# Altium PCB TM1638.PcbDoc (part 2 of 2)
Units mil, origin at the board's own origin, x right, y up, seen from the top; angles counter-clockwise.
Board outline 4735 x 2655 mil, 2 copper layers (Top Layer, Bottom Layer); 45 components, 32 nets, 151 pads, 57 vias.
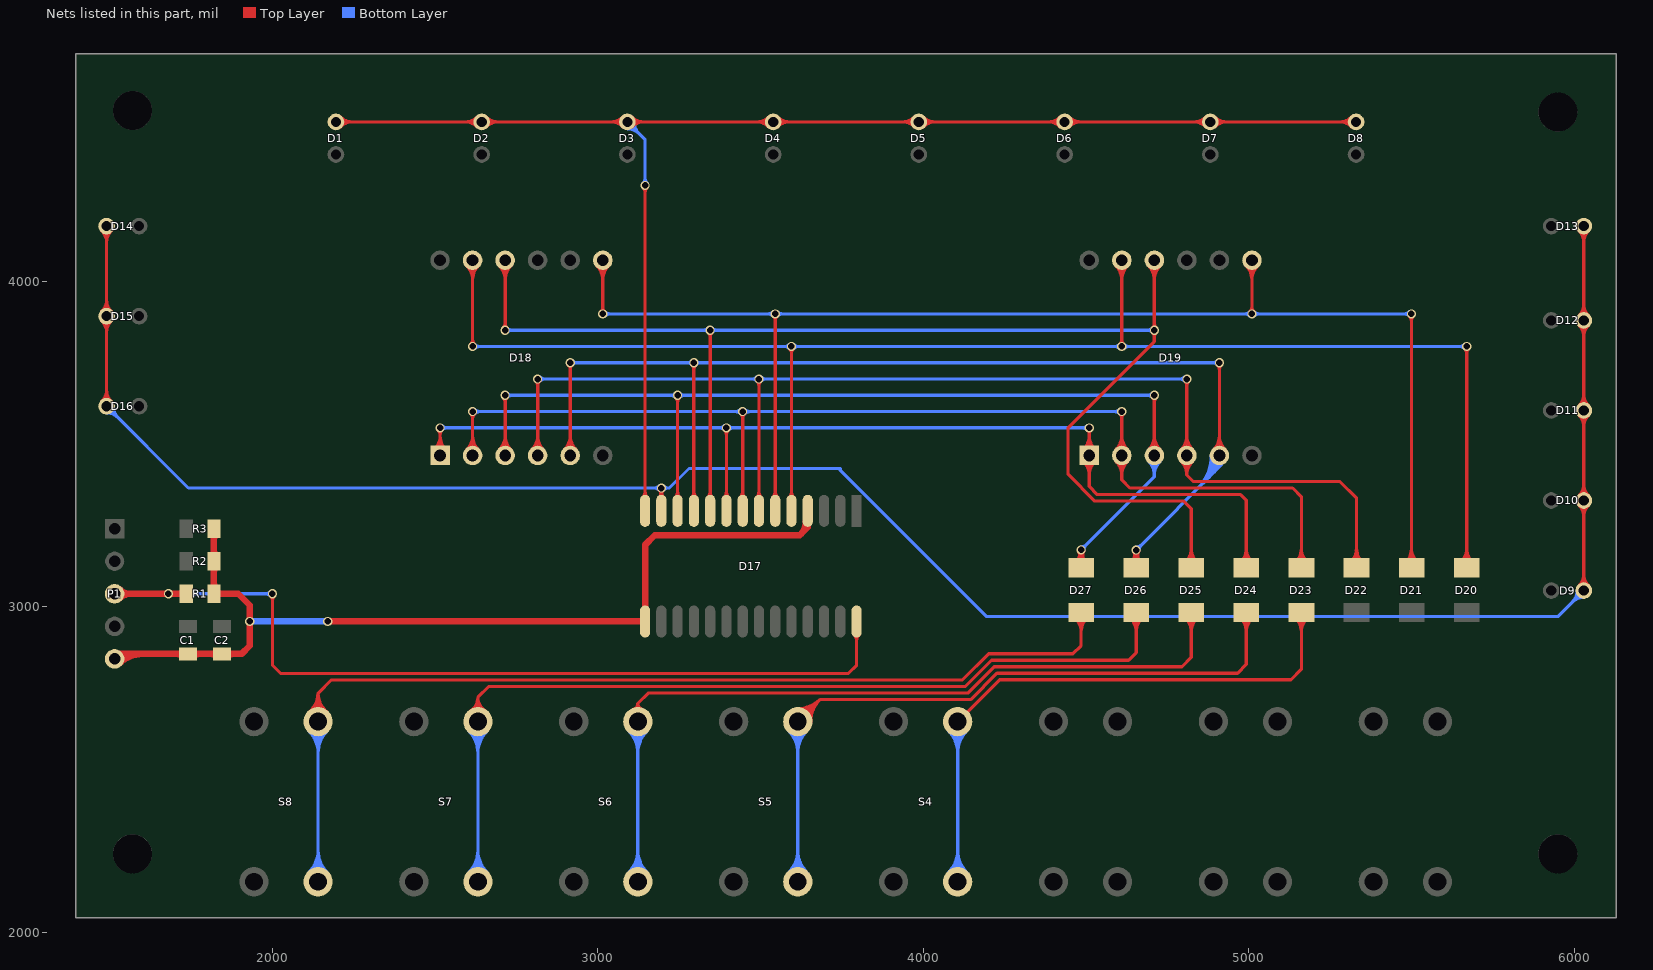
[diagram p2: the nets of this part, all layers, seen from the top]

## Via types
v1: diameter 28, hole 20, Top Layer to Bottom Layer, 57 vias

## Nets (pads, with @x,y where several pads share a name; then routed paths per layer and width w, separated by ;. In a path a pad name is that pad's centre, name@x,y a point inside that pad or via, vN(x,y) a via of type N, cw(c..) or ccw(c..) an arc to the next point about the centre after c; other vN are vias at no path point) (continued)
NetD23_2: D23.2 S4.2 | length 2620
  Top Layer w10: S4.2@4105.71,2647 4234.57,2775.86 5130,2775.86 5162.14,2808 D23.2@5162.14,2982.2 ; D23.2@5144.8,2964.86 cw(c5102.93,2922.99) 5162.14,2922.99 cw(c5221.36,2922.99) D23.2@5179.49,2964.86 ; D23.2@5151.87,2971.93 cw(c5127.07,2947.13) 5162.14,2947.13 cw(c5197.21,2947.13) D23.2@5172.41,2971.93
  Bottom Layer w10: S4.2@4077.43,2183.28 ccw(c4009.15,2251.57) 4105.71,2251.57 ccw(c4202.28,2251.57) S4.2@4134,2183.28 ; S4.2@4077.43,2618.72 cw(c4009.15,2550.43) 4105.71,2550.43 cw(c4202.28,2550.43) S4.2@4134,2618.72 ; S4.2@4084.5,2176.21 ccw(c4033.29,2227.43) 4105.71,2227.43 ccw(c4178.14,2227.43) S4.2@4126.93,2176.21 ; S4.2@4084.5,2625.79 cw(c4033.29,2574.57) 4105.71,2574.57 cw(c4178.14,2574.57) S4.2@4126.93,2625.79 ; S4.2@4091.57,2169.14 ccw(c4057.43,2203.28) 4105.71,2203.28 ccw(c4154,2203.28) S4.2@4119.86,2169.14 ; S4.2@4091.57,2632.86 cw(c4057.43,2598.72) 4105.71,2598.72 cw(c4154,2598.72) S4.2@4119.86,2632.86 ; S4.2@4105.71,2155 S4.2@4105.71,2647
NetD24_2: D24.2 S5.2 | length 3300.3
  Top Layer w10: S5.2@3614.35,2667 ccw(c3614.49,2714.79) 3648.28,2681 ccw(c3682.08,2647.2) S5.2@3634.29,2647.06 ; S5.2@3614.38,2677 ccw(c3614.59,2748.69) 3665.28,2698 ccw(c3715.98,2647.3) S5.2@3644.29,2647.09 ; S5.2@3614.41,2687 ccw(c3614.69,2782.59) 3682.28,2715 ; S5.2@3642,2647 S5.2@3614.29,2647 3682.29,2715 ; S5.2@3654.29,2647.12 cw(c3749.88,2647.4) 3682.28,2715 ; D24.2@4975.51,2964.86 cw(c4933.64,2922.99) 4992.86,2922.99 cw(c5052.07,2922.99) D24.2@5010.2,2964.86 ; D24.2@4982.58,2971.93 cw(c4957.78,2947.13) 4992.86,2947.13 cw(c5027.93,2947.13) D24.2@5003.13,2971.93 ; D24.2@4992.86,2982.2 4992.86,2822.86 4965.86,2795.86 4226.29,2795.86 4145.43,2715 3682.29,2715
  Bottom Layer w10: S5.2@3586,2183.28 ccw(c3517.72,2251.57) 3614.29,2251.57 ccw(c3710.85,2251.57) S5.2@3642.57,2183.28 ; S5.2@3586,2618.72 cw(c3517.72,2550.43) 3614.29,2550.43 cw(c3710.85,2550.43) S5.2@3642.57,2618.72 ; S5.2@3593.07,2176.21 ccw(c3541.86,2227.43) 3614.29,2227.43 ccw(c3686.71,2227.43) S5.2@3635.5,2176.21 ; S5.2@3593.07,2625.79 cw(c3541.86,2574.57) 3614.29,2574.57 cw(c3686.71,2574.57) S5.2@3635.5,2625.79 ; S5.2@3600.14,2169.14 ccw(c3566,2203.28) 3614.29,2203.28 ccw(c3662.57,2203.28) S5.2@3628.43,2169.14 ; S5.2@3600.14,2632.86 cw(c3566,2598.72) 3614.29,2598.72 cw(c3662.57,2598.72) S5.2@3628.43,2632.86 ; S5.2@3614.29,2155 S5.2@3614.29,2647
NetD25_2: D25.2 S6.2 | length 3322.9
  Top Layer w10: S6.2@3109.98,2684.87 ccw(c3103.86,2702.86) 3122.86,2702.86 ; S6.2@3122.86,2647 3122.86,2702.86 ; S6.2@3135.74,2684.87 cw(c3141.86,2702.86) 3122.86,2702.86 ; D25.2@4806.23,2964.86 cw(c4764.36,2922.99) 4823.57,2922.99 cw(c4882.79,2922.99) D25.2@4840.92,2964.86 ; D25.2@4813.3,2971.93 cw(c4788.5,2947.13) 4823.57,2947.13 cw(c4858.64,2947.13) D25.2@4833.84,2971.93 ; D25.2@4823.57,2982.2 4823.57,2844.43 4795,2815.86 4218,2815.86 4137.15,2735 3155,2735 3122.86,2702.86
  Bottom Layer w10: S6.2@3094.57,2183.28 ccw(c3026.29,2251.57) 3122.86,2251.57 ccw(c3219.43,2251.57) S6.2@3151.14,2183.28 ; S6.2@3094.57,2618.72 cw(c3026.29,2550.43) 3122.86,2550.43 cw(c3219.43,2550.43) S6.2@3151.14,2618.72 ; S6.2@3101.64,2176.21 ccw(c3050.43,2227.43) 3122.86,2227.43 ccw(c3195.28,2227.43) S6.2@3144.07,2176.21 ; S6.2@3101.64,2625.79 cw(c3050.43,2574.57) 3122.86,2574.57 cw(c3195.28,2574.57) S6.2@3144.07,2625.79 ; S6.2@3108.72,2169.14 ccw(c3074.57,2203.28) 3122.86,2203.28 ccw(c3171.14,2203.28) S6.2@3137,2169.14 ; S6.2@3108.72,2632.86 cw(c3074.57,2598.72) 3122.86,2598.72 cw(c3171.14,2598.72) S6.2@3137,2632.86 ; S6.2@3122.86,2155 S6.2@3122.86,2647
NetD26_2: D26.2 S7.2 | length 3770
  Top Layer w10: S7.2@2609.36,2680.36 ccw(c2582.19,2721.43) 2631.43,2721.43 ccw(c2680.67,2721.43) S7.2@2653.5,2680.36 ; S7.2@2614.88,2672.02 ccw(c2594.5,2702.82) 2631.43,2702.82 ccw(c2668.36,2702.82) S7.2@2647.98,2672.02 ; S7.2@2631.43,2647 2631.43,2721.43 2665,2755 4128.86,2755 4209.72,2835.86 4630.86,2835.86 4654.29,2859.29 D26.2@4654.29,2982.2 ; D26.2@4636.94,2964.86 cw(c4595.07,2922.99) 4654.29,2922.99 cw(c4713.5,2922.99) D26.2@4671.63,2964.86 ; D26.2@4644.01,2971.93 cw(c4619.21,2947.13) 4654.29,2947.13 cw(c4689.36,2947.13) D26.2@4664.56,2971.93
  Bottom Layer w10: S7.2@2603.14,2183.28 ccw(c2534.86,2251.57) 2631.43,2251.57 ccw(c2728,2251.57) S7.2@2659.71,2183.28 ; S7.2@2603.14,2618.72 cw(c2534.86,2550.43) 2631.43,2550.43 cw(c2728,2550.43) S7.2@2659.71,2618.72 ; S7.2@2610.21,2176.21 ccw(c2559,2227.43) 2631.43,2227.43 ccw(c2703.85,2227.43) S7.2@2652.64,2176.21 ; S7.2@2610.21,2625.79 cw(c2559,2574.57) 2631.43,2574.57 cw(c2703.85,2574.57) S7.2@2652.64,2625.79 ; S7.2@2617.29,2169.14 ccw(c2583.14,2203.28) 2631.43,2203.28 ccw(c2679.71,2203.28) S7.2@2645.57,2169.14 ; S7.2@2617.29,2632.86 cw(c2583.14,2598.72) 2631.43,2598.72 cw(c2679.71,2598.72) S7.2@2645.57,2632.86 ; S7.2@2631.43,2155 S7.2@2631.43,2647
NetD27_2: D27.2 S8.2 | length 4146.8
  Top Layer w10: S8.2@2113.7,2677.14 ccw(c2063.21,2735) 2140,2735 ; S8.2@2120.27,2669.6 ccw(c2082.41,2713) 2140,2713 ccw(c2197.59,2713) S8.2@2159.73,2669.6 ; S8.2@2140,2647 2140,2735 ; S8.2@2166.3,2677.14 cw(c2216.79,2735) 2140,2735 ; D27.2@4467.66,2964.86 cw(c4425.79,2922.99) 4485,2922.99 cw(c4544.21,2922.99) D27.2@4502.34,2964.86 ; D27.2@4474.73,2971.93 cw(c4449.93,2947.13) 4485,2947.13 cw(c4520.07,2947.13) D27.2@4495.27,2971.93 ; D27.2@4485,2982.2 4485,2880.86 4460,2855.86 4200.86,2855.86 4120,2775 2180,2775 2140,2735
  Bottom Layer w10: S8.2@2111.72,2183.28 ccw(c2043.43,2251.57) 2140,2251.57 ccw(c2236.57,2251.57) S8.2@2168.28,2183.28 ; S8.2@2111.72,2618.72 cw(c2043.43,2550.43) 2140,2550.43 cw(c2236.57,2550.43) S8.2@2168.28,2618.72 ; S8.2@2118.79,2176.21 ccw(c2067.57,2227.43) 2140,2227.43 ccw(c2212.43,2227.43) S8.2@2161.21,2176.21 ; S8.2@2118.79,2625.79 cw(c2067.57,2574.57) 2140,2574.57 cw(c2212.43,2574.57) S8.2@2161.21,2625.79 ; S8.2@2125.86,2169.14 ccw(c2091.72,2203.28) 2140,2203.28 ccw(c2188.28,2203.28) S8.2@2154.14,2169.14 ; S8.2@2125.86,2632.86 cw(c2091.72,2598.72) 2140,2598.72 cw(c2188.28,2598.72) S8.2@2154.14,2632.86 ; S8.2@2140,2155 S8.2@2140,2647
SEG1: D17.5 D18.11 D19.11 D20.1 | length 5603.5
  Top Layer w10: D18.11@2597.32,4047.32 cw(c2554.64,4004.64) 2615,4004.64 cw(c2675.36,4004.64) D18.11@2632.68,4047.32 ; D18.11@2604.39,4054.39 cw(c2578.79,4028.79) 2615,4028.79 cw(c2651.21,4028.79) D18.11@2625.61,4054.39 ; v1@2608.64,3806.36 ccw(c2593.27,3821.73) 2615,3821.73 ccw(c2636.73,3821.73) v1@2621.36,3806.36 ; v1(2615,3800) D18.11@2615,4065 ; D17.5@3587.4,3336.06 ccw(c3569.05,3354.41) 3595,3354.41 ccw(c3620.95,3354.41) D17.5@3602.6,3336.06 ; v1@3588.64,3793.64 cw(c3573.27,3778.27) 3595,3778.27 cw(c3616.73,3778.27) v1@3601.36,3793.64 ; D17.5@3595,3295 v1(3595,3800) ; D19.11@4592.32,4047.32 cw(c4549.64,4004.64) 4610,4004.64 cw(c4670.36,4004.64) D19.11@4627.68,4047.32 ; D19.11@4599.39,4054.39 cw(c4573.79,4028.79) 4610,4028.79 cw(c4646.21,4028.79) D19.11@4620.61,4054.39 ; v1@4603.64,3806.36 ccw(c4588.27,3821.73) 4610,3821.73 ccw(c4631.73,3821.73) v1@4616.36,3806.36 ; v1(4610,3800) D19.11@4610,4065 ; D20.1@5652.66,3137.34 ccw(c5610.79,3179.21) 5670,3179.21 ccw(c5729.21,3179.21) D20.1@5687.34,3137.34 ; D20.1@5659.73,3130.27 ccw(c5634.93,3155.07) 5670,3155.07 ccw(c5705.07,3155.07) D20.1@5680.27,3130.27 ; v1@5663.64,3793.64 cw(c5648.27,3778.27) 5670,3778.27 cw(c5691.73,3778.27) v1@5676.36,3793.64 ; D20.1@5670,3120 v1(5670,3800)
  Bottom Layer w10: v1(2615,3800) v1(3595,3800) v1(4610,3800) v1(5670,3800) ; v1@2621.36,3793.64 cw(c2636.73,3778.27) 2636.73,3800 cw(c2636.73,3821.73) v1@2621.36,3806.36 ; v1@3588.64,3793.64 ccw(c3573.27,3778.27) 3573.27,3800 ccw(c3573.27,3821.73) v1@3588.64,3806.36 ; v1@3601.36,3793.64 cw(c3616.73,3778.27) 3616.73,3800 cw(c3616.73,3821.73) v1@3601.36,3806.36 ; v1@4603.64,3793.64 ccw(c4588.27,3778.27) 4588.27,3800 ccw(c4588.27,3821.73) v1@4603.64,3806.36 ; v1@4616.36,3793.64 cw(c4631.73,3778.27) 4631.73,3800 cw(c4631.73,3821.73) v1@4616.36,3806.36 ; v1@5663.64,3793.64 ccw(c5648.27,3778.27) 5648.27,3800 ccw(c5648.27,3821.73) v1@5663.64,3806.36
SEG2: D17.6 D18.7 D19.7 D21.1 | length 5033.8
  Top Layer w10: D18.7@2997.32,4047.32 cw(c2954.64,4004.64) 3015,4004.64 cw(c3075.36,4004.64) D18.7@3032.68,4047.32 ; D18.7@3004.39,4054.39 cw(c2978.79,4028.79) 3015,4028.79 cw(c3051.21,4028.79) D18.7@3025.61,4054.39 ; v1@3008.64,3906.36 ccw(c2993.27,3921.73) 3015,3921.73 ccw(c3036.73,3921.73) v1@3021.36,3906.36 ; v1(3015,3900) D18.7@3015,4065 ; D17.6@3537.4,3336.06 ccw(c3519.05,3354.41) 3545,3354.41 ccw(c3570.95,3354.41) D17.6@3552.6,3336.06 ; v1@3538.64,3893.64 cw(c3523.27,3878.27) 3545,3878.27 cw(c3566.73,3878.27) v1@3551.36,3893.64 ; D17.6@3545,3295 v1(3545,3900) ; D19.7@4992.32,4047.32 cw(c4949.64,4004.64) 5010,4004.64 cw(c5070.36,4004.64) D19.7@5027.68,4047.32 ; D19.7@4999.39,4054.39 cw(c4973.79,4028.79) 5010,4028.79 cw(c5046.21,4028.79) D19.7@5020.61,4054.39 ; v1@5003.64,3906.36 ccw(c4988.27,3921.73) 5010,3921.73 ccw(c5031.73,3921.73) v1@5016.36,3906.36 ; v1(5010,3900) D19.7@5010,4065 ; D21.1@5483.37,3137.34 ccw(c5443.22,3177.49) 5500,3177.49 ; D21.1@5490.44,3130.27 ccw(c5467.37,3153.35) 5500,3153.35 ; v1@5493.64,3893.64 cw(c5478.27,3878.27) 5500,3878.27 cw(c5521.73,3878.27) v1@5506.36,3893.64 ; 5500,3156.8 ccw(c5537.51,3156.8) D21.1@5510.99,3130.27 ; 5500,3180.94 ccw(c5561.65,3180.94) D21.1@5518.06,3137.34 ; v1(5500,3900) 5500,3120.71 D21.1@5500.71,3120
  Bottom Layer w10: v1(3015,3900) v1(3545,3900) v1(5010,3900) v1(5500,3900) ; v1@3021.36,3893.64 cw(c3036.73,3878.27) 3036.73,3900 cw(c3036.73,3921.73) v1@3021.36,3906.36 ; v1@3538.64,3893.64 ccw(c3523.27,3878.27) 3523.27,3900 ccw(c3523.27,3921.73) v1@3538.64,3906.36 ; v1@3551.36,3893.64 cw(c3566.73,3878.27) 3566.73,3900 cw(c3566.73,3921.73) v1@3551.36,3906.36 ; v1@5003.64,3893.64 ccw(c4988.27,3878.27) 4988.27,3900 ccw(c4988.27,3921.73) v1@5003.64,3906.36 ; v1@5016.36,3893.64 cw(c5031.73,3878.27) 5031.73,3900 cw(c5031.73,3921.73) v1@5016.36,3906.36 ; v1@5493.64,3893.64 ccw(c5478.27,3878.27) 5478.27,3900 ccw(c5478.27,3921.73) v1@5493.64,3906.36
SEG3: D17.7 D18.4 D19.4 D22.1 | length 4576.1
  Top Layer w10: D18.4@2797.32,3482.68 ccw(c2754.64,3525.36) 2815,3525.36 ccw(c2875.36,3525.36) D18.4@2832.68,3482.68 ; D18.4@2804.39,3475.61 ccw(c2778.79,3501.21) 2815,3501.21 ccw(c2851.21,3501.21) D18.4@2825.61,3475.61 ; v1@2808.64,3693.64 cw(c2793.27,3678.27) 2815,3678.27 cw(c2836.73,3678.27) v1@2821.36,3693.64 ; D18.4@2815,3465 v1(2815,3700) ; D17.7@3487.4,3336.06 ccw(c3469.05,3354.41) 3495,3354.41 ccw(c3520.95,3354.41) D17.7@3502.6,3336.06 ; v1@3488.64,3693.64 cw(c3473.27,3678.27) 3495,3678.27 cw(c3516.73,3678.27) v1@3501.36,3693.64 ; D17.7@3495,3295 v1(3495,3700) ; D19.4@4792.32,3482.68 ccw(c4749.64,3525.36) 4810,3525.36 ccw(c4870.36,3525.36) D19.4@4827.68,3482.68 ; D19.4@4792.4,3447.25 cw(c4750.51,3405) 4810,3405 ; D19.4@4799.39,3475.61 ccw(c4773.79,3501.21) 4810,3501.21 ccw(c4846.21,3501.21) D19.4@4820.61,3475.61 ; D19.4@4799.44,3454.35 cw(c4774.3,3429) 4810,3429 cw(c4845.7,3429) D19.4@4820.56,3454.35 ; v1@4803.64,3693.64 cw(c4788.27,3678.27) 4810,3678.27 cw(c4831.73,3678.27) v1@4816.36,3693.64 ; v1(4810,3700) D19.4@4810,3465 4810,3405 ; D19.4@4827.6,3447.25 ccw(c4869.49,3405) 4810,3405 ; D22.1@5314.08,3137.34 ccw(c5272.21,3179.21) 5331.43,3179.21 ccw(c5390.64,3179.21) D22.1@5348.77,3137.34 ; D22.1@5321.16,3130.27 ccw(c5296.36,3155.07) 5331.43,3155.07 ccw(c5366.5,3155.07) D22.1@5341.7,3130.27 ; D22.1@5331.43,3120 5331.43,3333.57 5280,3385 4830,3385 4810,3405
  Bottom Layer w10: v1(2815,3700) v1(4810,3700) ; v1@2821.36,3693.64 cw(c2836.73,3678.27) 2836.73,3700 cw(c2836.73,3721.73) v1@2821.36,3706.36 ; v1@3488.64,3693.64 ccw(c3473.27,3678.27) 3473.27,3700 ccw(c3473.27,3721.73) v1@3488.64,3706.36 ; v1@3501.36,3693.64 cw(c3516.73,3678.27) 3516.73,3700 cw(c3516.73,3721.73) v1@3501.36,3706.36 ; v1@4803.64,3693.64 ccw(c4788.27,3678.27) 4788.27,3700 ccw(c4788.27,3721.73) v1@4803.64,3706.36
SEG4: D17.8 D18.2 D19.2 D23.1 | length 4319.4
  Top Layer w10: D18.2@2597.32,3482.68 ccw(c2554.64,3525.36) 2615,3525.36 ccw(c2675.36,3525.36) D18.2@2632.68,3482.68 ; D18.2@2604.39,3475.61 ccw(c2578.79,3501.21) 2615,3501.21 ccw(c2651.21,3501.21) D18.2@2625.61,3475.61 ; v1@2608.64,3593.64 cw(c2593.27,3578.27) 2615,3578.27 cw(c2636.73,3578.27) v1@2621.36,3593.64 ; D18.2@2615,3465 v1(2615,3600) ; D17.8@3437.4,3336.06 ccw(c3419.05,3354.41) 3445,3354.41 ccw(c3470.95,3354.41) D17.8@3452.6,3336.06 ; v1@3438.64,3593.64 cw(c3423.27,3578.27) 3445,3578.27 cw(c3466.73,3578.27) v1@3451.36,3593.64 ; D17.8@3445,3295 v1(3445,3600) ; D19.2@4592.32,3447.32 cw(c4549.64,3404.64) 4610,3404.64 cw(c4670.36,3404.64) D19.2@4627.68,3447.32 ; D19.2@4592.32,3482.68 ccw(c4549.64,3525.36) 4610,3525.36 ccw(c4670.36,3525.36) D19.2@4627.68,3482.68 ; D19.2@4599.39,3454.39 cw(c4573.79,3428.79) 4610,3428.79 cw(c4646.21,3428.79) D19.2@4620.61,3454.39 ; D19.2@4599.39,3475.61 ccw(c4573.79,3501.21) 4610,3501.21 ccw(c4646.21,3501.21) D19.2@4620.61,3475.61 ; v1@4603.64,3593.64 cw(c4588.27,3578.27) 4610,3578.27 cw(c4631.73,3578.27) v1@4616.36,3593.64 ; v1(4610,3600) D19.2@4610,3465 4610,3390 4635,3365 5135,3365 5162.14,3337.86 D23.1@5162.14,3120 ; D23.1@5144.8,3137.34 ccw(c5102.93,3179.21) 5162.14,3179.21 ccw(c5221.36,3179.21) D23.1@5179.49,3137.34 ; D23.1@5151.87,3130.27 ccw(c5127.07,3155.07) 5162.14,3155.07 ccw(c5197.21,3155.07) D23.1@5172.41,3130.27
  Bottom Layer w10: v1(2615,3600) v1(4610,3600) ; v1@2621.36,3593.64 cw(c2636.73,3578.27) 2636.73,3600 cw(c2636.73,3621.73) v1@2621.36,3606.36 ; v1@3438.64,3593.64 ccw(c3423.27,3578.27) 3423.27,3600 ccw(c3423.27,3621.73) v1@3438.64,3606.36 ; v1@3451.36,3593.64 cw(c3466.73,3578.27) 3466.73,3600 cw(c3466.73,3621.73) v1@3451.36,3606.36 ; v1@4603.64,3593.64 ccw(c4588.27,3578.27) 4588.27,3600 ccw(c4588.27,3621.73) v1@4603.64,3606.36
SEG5: D17.9 D18.1 D19.1 D24.1 | length 4105.6
  Top Layer w10: D18.1@2497.32,3482.68 ccw(c2454.64,3525.36) 2515,3525.36 ccw(c2575.36,3525.36) D18.1@2532.68,3482.68 ; D18.1@2504.39,3475.61 ccw(c2478.79,3501.21) 2515,3501.21 ccw(c2551.21,3501.21) D18.1@2525.61,3475.61 ; v1@2508.64,3543.64 cw(c2493.27,3528.27) 2515,3528.27 cw(c2536.73,3528.27) v1@2521.36,3543.64 ; D18.1@2515,3465 v1(2515,3550) ; D17.9@3387.4,3336.06 ccw(c3369.05,3354.41) 3395,3354.41 ccw(c3420.95,3354.41) D17.9@3402.6,3336.06 ; v1@3388.64,3543.64 cw(c3373.27,3528.27) 3395,3528.27 cw(c3416.73,3528.27) v1@3401.36,3543.64 ; D17.9@3395,3295 v1(3395,3550) ; D19.1@4492.32,3447.32 cw(c4449.64,3404.64) 4510,3404.64 cw(c4570.36,3404.64) D19.1@4527.68,3447.32 ; D19.1@4492.32,3482.68 ccw(c4449.64,3525.36) 4510,3525.36 ccw(c4570.36,3525.36) D19.1@4527.68,3482.68 ; D19.1@4499.39,3454.39 cw(c4473.79,3428.79) 4510,3428.79 cw(c4546.21,3428.79) D19.1@4520.61,3454.39 ; D19.1@4499.39,3475.61 ccw(c4473.79,3501.21) 4510,3501.21 ccw(c4546.21,3501.21) D19.1@4520.61,3475.61 ; v1@4503.64,3543.64 cw(c4488.27,3528.27) 4510,3528.27 cw(c4531.73,3528.27) v1@4516.36,3543.64 ; v1(4510,3550) D19.1@4510,3465 4510,3370 4535,3345 4975,3345 4992.86,3327.14 D24.1@4992.86,3120 ; D24.1@4975.51,3137.34 ccw(c4933.64,3179.21) 4992.86,3179.21 ccw(c5052.07,3179.21) D24.1@5010.2,3137.34 ; D24.1@4982.58,3130.27 ccw(c4957.78,3155.07) 4992.86,3155.07 ccw(c5027.93,3155.07) D24.1@5003.13,3130.27
  Bottom Layer w10: v1(2515,3550) v1(4510,3550) ; v1@2521.36,3543.64 cw(c2536.73,3528.27) 2536.73,3550 cw(c2536.73,3571.73) v1@2521.36,3556.36 ; v1@3388.64,3543.64 ccw(c3373.27,3528.27) 3373.27,3550 ccw(c3373.27,3571.73) v1@3388.64,3556.36 ; v1@3401.36,3543.64 cw(c3416.73,3528.27) 3416.73,3550 cw(c3416.73,3571.73) v1@3401.36,3556.36 ; v1@4503.64,3543.64 ccw(c4488.27,3528.27) 4488.27,3550 ccw(c4488.27,3571.73) v1@4503.64,3556.36
SEG6: D17.10 D18.10 D19.10 D25.1 | length 4901.9
  Top Layer w10: D18.10@2697.32,4047.32 cw(c2654.64,4004.64) 2715,4004.64 cw(c2775.36,4004.64) D18.10@2732.68,4047.32 ; D18.10@2704.39,4054.39 cw(c2678.79,4028.79) 2715,4028.79 cw(c2751.21,4028.79) D18.10@2725.61,4054.39 ; v1@2708.64,3856.36 ccw(c2693.27,3871.73) 2715,3871.73 ccw(c2736.73,3871.73) v1@2721.36,3856.36 ; v1(2715,3850) D18.10@2715,4065 ; D17.10@3337.4,3336.06 ccw(c3319.05,3354.41) 3345,3354.41 ccw(c3370.95,3354.41) D17.10@3352.6,3336.06 ; v1@3338.64,3843.64 cw(c3323.27,3828.27) 3345,3828.27 cw(c3366.73,3828.27) v1@3351.36,3843.64 ; D17.10@3345,3295 v1(3345,3850) ; D19.10@4692.32,4047.32 cw(c4649.64,4004.64) 4710,4004.64 cw(c4770.36,4004.64) D19.10@4727.68,4047.32 ; D19.10@4699.39,4054.39 cw(c4673.79,4028.79) 4710,4028.79 cw(c4746.21,4028.79) D19.10@4720.61,4054.39 ; v1@4703.64,3843.64 cw(c4688.27,3828.27) 4710,3828.27 cw(c4731.73,3828.27) v1@4716.36,3843.64 ; v1@4703.64,3856.36 ccw(c4688.27,3871.73) 4710,3871.73 ccw(c4731.73,3871.73) v1@4716.36,3856.36 ; D19.10@4710,4065 v1(4710,3850) 4710,3815 4445,3550 4445,3406.72 4526.72,3325 4800,3325 4823.57,3301.43 D25.1@4823.57,3120 ; D25.1@4806.23,3137.34 ccw(c4764.36,3179.21) 4823.57,3179.21 ccw(c4882.79,3179.21) D25.1@4840.92,3137.34 ; D25.1@4813.3,3130.27 ccw(c4788.5,3155.07) 4823.57,3155.07 ccw(c4858.64,3155.07) D25.1@4833.84,3130.27
  Bottom Layer w10: v1(2715,3850) v1(3345,3850) v1(4710,3850) ; v1@2721.36,3843.64 cw(c2736.73,3828.27) 2736.73,3850 cw(c2736.73,3871.73) v1@2721.36,3856.36 ; v1@3338.64,3843.64 ccw(c3323.27,3828.27) 3323.27,3850 ccw(c3323.27,3871.73) v1@3338.64,3856.36 ; v1@3351.36,3843.64 cw(c3366.73,3828.27) 3366.73,3850 cw(c3366.73,3871.73) v1@3351.36,3856.36 ; v1@4703.64,3843.64 ccw(c4688.27,3828.27) 4688.27,3850 ccw(c4688.27,3871.73) v1@4703.64,3856.36
SEG7: D17.11 D18.5 D19.5 D26.1 | length 4728.7
  Top Layer w10: D18.5@2897.32,3482.68 ccw(c2854.64,3525.36) 2915,3525.36 ccw(c2975.36,3525.36) D18.5@2932.68,3482.68 ; D18.5@2904.39,3475.61 ccw(c2878.79,3501.21) 2915,3501.21 ccw(c2951.21,3501.21) D18.5@2925.61,3475.61 ; v1@2908.64,3743.64 cw(c2893.27,3728.27) 2915,3728.27 cw(c2936.73,3728.27) v1@2921.36,3743.64 ; D18.5@2915,3465 v1(2915,3750) ; D17.11@3287.4,3336.06 ccw(c3269.05,3354.41) 3295,3354.41 ccw(c3320.95,3354.41) D17.11@3302.6,3336.06 ; v1@3288.64,3743.64 cw(c3273.27,3728.27) 3295,3728.27 cw(c3316.73,3728.27) v1@3301.36,3743.64 ; D17.11@3295,3295 v1(3295,3750) ; D26.1@4638.08,3138.41 ccw(c4606.48,3174.28) v1(4654.29,3174.29) ; D26.1@4644.68,3130.9 ccw(c4625.97,3152.15) 4654.29,3152.15 ccw(c4682.6,3152.15) D26.1@4663.89,3130.9 ; v1@4646.49,3169.79 cw(c4627.67,3158.92) 4648.66,3153.3 cw(c4669.65,3147.68) v1@4658.79,3166.49 ; v1@4647.92,3167.92 cw(c4632.56,3152.56) 4654.29,3152.56 cw(c4676.01,3152.56) v1@4660.65,3167.92 ; v1@4649.79,3166.49 cw(c4638.92,3147.68) 4659.91,3153.3 cw(c4680.9,3158.92) v1@4662.08,3169.79 ; D26.1@4654.29,3120 v1(4654.29,3174.29) ; D26.1@4670.5,3138.41 cw(c4702.09,3174.28) v1(4654.29,3174.29) ; D19.5@4892.32,3482.68 ccw(c4849.64,3525.36) 4910,3525.36 ccw(c4970.36,3525.36) D19.5@4927.68,3482.68 ; D19.5@4899.39,3475.61 ccw(c4873.79,3501.21) 4910,3501.21 ccw(c4946.21,3501.21) D19.5@4920.61,3475.61 ; v1@4903.64,3743.64 cw(c4888.27,3728.27) 4910,3728.27 cw(c4931.73,3728.27) v1@4916.36,3743.64 ; D19.5@4910,3465 v1(4910,3750)
  Bottom Layer w10: v1(2915,3750) v1(4910,3750) ; v1@2921.36,3743.64 cw(c2936.73,3728.27) 2936.73,3750 cw(c2936.73,3771.73) v1@2921.36,3756.36 ; v1@3288.64,3743.64 ccw(c3273.27,3728.27) 3273.27,3750 ccw(c3273.27,3771.73) v1@3288.64,3756.36 ; v1@3301.36,3743.64 cw(c3316.73,3728.27) 3316.73,3750 cw(c3316.73,3771.73) v1@3301.36,3756.36 ; v1(4654.29,3174.29) 4910,3430 ; v1@4654.29,3183.29 ccw(c4654.29,3205.01) 4669.65,3189.65 ccw(c4685.01,3174.29) v1@4663.29,3174.29 ; 4842.57,3362.57 ccw(c4740.15,3465) D19.5@4885,3465 ; 4859.64,3379.64 ccw(c4774.29,3465) D19.5@4895,3465 ; 4876.72,3396.72 ccw(c4808.43,3465) D19.5@4905,3465 ; 4893.79,3413.79 ccw(c4842.57,3465) D19.5@4915,3465 ; D19.5@4901.89,3441.35 cw(c4898,3430) 4910,3430 ; v1@4903.64,3743.64 ccw(c4888.27,3728.27) 4888.27,3750 ccw(c4888.27,3771.73) v1@4903.64,3756.36 ; D19.5@4910,3465 4910,3430 ; 4910.86,3430.86 ccw(c4876.72,3465) D19.5@4925,3465 ; D19.5@4918.11,3441.35 ccw(c4922,3430) 4910,3430
SEG8: D17.12 D18.3 D19.3 D27.1 | length 4161.4
  Top Layer w10: D18.3@2697.32,3482.68 ccw(c2654.64,3525.36) 2715,3525.36 ccw(c2775.36,3525.36) D18.3@2732.68,3482.68 ; D18.3@2704.39,3475.61 ccw(c2678.79,3501.21) 2715,3501.21 ccw(c2751.21,3501.21) D18.3@2725.61,3475.61 ; v1@2708.64,3643.64 cw(c2693.27,3628.27) 2715,3628.27 cw(c2736.73,3628.27) v1@2721.36,3643.64 ; D18.3@2715,3465 v1(2715,3650) ; D17.12@3237.4,3336.06 ccw(c3219.05,3354.41) 3245,3354.41 ccw(c3270.95,3354.41) D17.12@3252.6,3336.06 ; v1@3238.64,3643.64 cw(c3223.27,3628.27) 3245,3628.27 cw(c3266.73,3628.27) v1@3251.36,3643.64 ; D17.12@3245,3295 v1(3245,3650) ; D27.1@4468.61,3138.25 ccw(c4435.61,3175) v1(4485,3175) ; D27.1@4475.29,3130.81 ccw(c4455.74,3152.57) 4485,3152.57 ccw(c4514.26,3152.57) D27.1@4494.71,3130.81 ; v1@4477.21,3170.5 cw(c4458.39,3159.63) 4479.38,3154.01 cw(c4500.36,3148.39) v1@4489.5,3167.21 ; v1@4478.64,3168.64 cw(c4463.27,3153.27) 4485,3153.27 cw(c4506.73,3153.27) v1@4491.36,3168.64 ; v1@4480.5,3167.21 cw(c4469.64,3148.39) 4490.62,3154.01 cw(c4511.61,3159.63) v1@4492.79,3170.5 ; D27.1@4485,3120 v1(4485,3175) ; D27.1@4501.39,3138.25 cw(c4534.39,3175) v1(4485,3175) ; D19.3@4692.32,3482.68 ccw(c4649.64,3525.36) 4710,3525.36 ccw(c4770.36,3525.36) D19.3@4727.68,3482.68 ; D19.3@4699.39,3475.61 ccw(c4673.79,3501.21) 4710,3501.21 ccw(c4746.21,3501.21) D19.3@4720.61,3475.61 ; v1@4703.64,3643.64 cw(c4688.27,3628.27) 4710,3628.27 cw(c4731.73,3628.27) v1@4716.36,3643.64 ; D19.3@4710,3465 v1(4710,3650)
  Bottom Layer w10: v1(2715,3650) v1(4710,3650) ; v1@2721.36,3643.64 cw(c2736.73,3628.27) 2736.73,3650 cw(c2736.73,3671.73) v1@2721.36,3656.36 ; v1@3238.64,3643.64 ccw(c3223.27,3628.27) 3223.27,3650 ccw(c3223.27,3671.73) v1@3238.64,3656.36 ; v1@3251.36,3643.64 cw(c3266.73,3628.27) 3266.73,3650 cw(c3266.73,3671.73) v1@3251.36,3656.36 ; v1(4485,3175) 4710,3400 D19.3@4710,3465 ; v1@4485,3184 ccw(c4485,3205.73) 4500.36,3190.36 ccw(c4515.73,3175) v1@4494,3175 ; D19.3@4692.32,3447.32 cw(c4649.64,3404.64) 4710,3404.64 cw(c4770.36,3404.64) D19.3@4727.68,3447.32 ; D19.3@4699.39,3454.39 cw(c4673.79,3428.79) 4710,3428.79 cw(c4746.21,3428.79) D19.3@4720.61,3454.39 ; v1@4703.64,3643.64 ccw(c4688.27,3628.27) 4688.27,3650 ccw(c4688.27,3671.73) v1@4703.64,3656.36
SEG9: D9.1 D10.1 D11.1 D12.1 D13.1 D14.1 D15.1 D16.1 D17.13 | length 7919.6
  Top Layer w10: D16.1@1475.44,3631.23 ccw(c1440.29,3666.38) 1490,3666.38 ccw(c1539.71,3666.38) D16.1@1504.56,3631.23 ; D15.1@1475.44,3878.77 cw(c1440.29,3843.62) 1490,3843.62 cw(c1539.71,3843.62) D15.1@1504.56,3878.77 ; D15.1@1475.44,3907.89 ccw(c1440.29,3943.04) 1490,3943.04 ccw(c1539.71,3943.04) D15.1@1504.56,3907.89 ; D14.1@1475.44,4155.44 cw(c1440.29,4120.29) 1490,4120.29 cw(c1539.71,4120.29) D14.1@1504.56,4155.44 ; D16.1@1490,3616.67 D15.1@1490,3893.33 D14.1@1490,4170 ; D17.13@3187.4,3336.06 ccw(c3169.05,3354.41) 3195,3354.41 ccw(c3220.95,3354.41) D17.13@3202.6,3336.06 ; v1@3188.64,3358.64 cw(c3173.27,3343.27) 3195,3343.27 cw(c3216.73,3343.27) v1@3201.36,3358.64 ; v1@3189.06,3358.24 cw(c3181.06,3349.16) 3192.75,3346.02 ; v1@3190.5,3357.21 cw(c3184.31,3346.49) 3196.26,3349.69 ; 3193.74,3349.69 cw(c3205.69,3346.49) v1@3199.5,3357.21 ; D17.13@3195,3295 v1(3195,3365) ; 3197.25,3346.02 cw(c3208.94,3349.16) v1@3200.94,3358.24 ; D9.1@6015.44,3064.56 ccw(c5980.29,3099.71) 6030,3099.71 ccw(c6079.71,3099.71) D9.1@6044.56,3064.56 ; D10.1@6015.44,3312.11 cw(c5980.29,3276.96) 6030,3276.96 cw(c6079.71,3276.96) D10.1@6044.56,3312.11 ; D10.1@6015.44,3341.23 ccw(c5980.29,3376.38) 6030,3376.38 ccw(c6079.71,3376.38) D10.1@6044.56,3341.23 ; D11.1@6015.44,3588.77 cw(c5980.29,3553.62) 6030,3553.62 cw(c6079.71,3553.62) D11.1@6044.56,3588.77 ; D11.1@6015.44,3617.89 ccw(c5980.29,3653.04) 6030,3653.04 ccw(c6079.71,3653.04) D11.1@6044.56,3617.89 ; D12.1@6015.44,3865.44 cw(c5980.29,3830.29) 6030,3830.29 cw(c6079.71,3830.29) D12.1@6044.56,3865.44 ; D12.1@6015.44,3894.56 ccw(c5980.29,3929.71) 6030,3929.71 ccw(c6079.71,3929.71) D12.1@6044.56,3894.56 ; D13.1@6015.44,4155.44 cw(c5980.29,4120.29) 6030,4120.29 cw(c6079.71,4120.29) D13.1@6044.56,4155.44 ; D9.1@6030,3050 D10.1@6030,3326.67 D11.1@6030,3603.33 D12.1@6030,3880 D13.1@6030,4170
  Bottom Layer w10: D16.1@1490,3596.08 cw(c1490,3546.37) 1525.15,3581.52 cw(c1560.3,3616.67) D16.1@1510.59,3616.67 ; D16.1@1490,3616.67 1741.67,3365 v1(3195,3365) 3220,3365 3280,3425 3745,3425 3745,3420 4195,2970 5950,2970 D9.1@6030,3050 ; v1@3188.64,3358.64 ccw(c3173.27,3343.27) 3173.27,3365 ccw(c3173.27,3386.73) v1@3188.64,3371.36 ; v1@3201.36,3358.64 cw(c3216.73,3343.27) 3216.73,3365 cw(c3216.73,3386.73) v1@3201.36,3371.36 ; D9.1@6009.41,3050 cw(c5959.7,3050) 5994.85,3014.85 cw(c6030,2979.7) D9.1@6030,3029.41
SEG10: D1.1 D2.1 D3.1 D4.1 D5.1 D6.1 D7.1 D8.1 D17.14 | length 5632.8
  Top Layer w10: D1.1@2195,4490 D2.1@2642.86,4490 D3.1@3090.71,4490 D4.1@3538.57,4490 D5.1@3986.43,4490 D6.1@4434.29,4490 D7.1@4882.14,4490 D8.1@5330,4490 ; D1.1@2209.56,4475.44 cw(c2244.71,4440.29) 2244.71,4490 cw(c2244.71,4539.71) D1.1@2209.56,4504.56 ; D2.1@2628.3,4475.44 ccw(c2593.15,4440.29) 2593.15,4490 ccw(c2593.15,4539.71) D2.1@2628.3,4504.56 ; D2.1@2657.42,4475.44 cw(c2692.57,4440.29) 2692.57,4490 cw(c2692.56,4539.71) D2.1@2657.42,4504.56 ; D3.1@3076.15,4475.44 ccw(c3041,4440.29) 3041,4490 ccw(c3041,4539.71) D3.1@3076.15,4504.56 ; D3.1@3105.27,4475.44 cw(c3140.42,4440.29) 3140.42,4490 cw(c3140.42,4539.71) D3.1@3105.27,4504.56 ; D17.14@3137.4,3336.06 ccw(c3119.05,3354.41) 3145,3354.41 ccw(c3170.95,3354.41) D17.14@3152.6,3336.06 ; v1@3138.64,4288.64 cw(c3123.27,4273.27) 3145,4273.27 cw(c3166.73,4273.27) v1@3151.36,4288.64 ; D17.14@3145,3295 v1(3145,4295) ; D4.1@3524.01,4475.44 ccw(c3488.86,4440.29) 3488.86,4490 ccw(c3488.86,4539.71) D4.1@3524.01,4504.56 ; D4.1@3553.13,4475.44 cw(c3588.28,4440.29) 3588.28,4490 cw(c3588.28,4539.71) D4.1@3553.13,4504.56 ; D5.1@3971.87,4475.44 ccw(c3936.72,4440.29) 3936.72,4490 ccw(c3936.72,4539.71) D5.1@3971.87,4504.56 ; D5.1@4000.99,4475.44 cw(c4036.14,4440.29) 4036.14,4490 cw(c4036.14,4539.71) D5.1@4000.99,4504.56 ; 4384.57,4490 cw(c4384.57,4440.29) D6.1@4419.73,4475.44 ; 4384.58,4490 ccw(c4384.58,4539.71) D6.1@4419.73,4504.56 ; D6.1@4448.85,4475.44 cw(c4484,4440.29) 4484,4490 cw(c4483.99,4539.71) D6.1@4448.85,4504.56 ; D7.1@4867.58,4475.44 ccw(c4832.43,4440.29) 4832.43,4490 ccw(c4832.43,4539.71) D7.1@4867.58,4504.56 ; D7.1@4896.7,4475.44 cw(c4931.85,4440.29) 4931.85,4490 cw(c4931.85,4539.71) D7.1@4896.7,4504.56 ; D8.1@5315.44,4475.44 ccw(c5280.29,4440.29) 5280.29,4490 ccw(c5280.29,4539.71) D8.1@5315.44,4504.56
  Bottom Layer w10: D3.1@3090.71,4469.41 cw(c3090.71,4419.7) 3125.86,4454.85 cw(c3161.01,4490) D3.1@3111.3,4490 ; D3.1@3090.71,4490 3145,4435.71 v1(3145,4295) ; v1@3138.64,4301.36 ccw(c3123.27,4316.73) 3145,4316.73 ccw(c3166.73,4316.73) v1@3151.36,4301.36
STB0: D17.28 P1.3 R1.1 | length 3035.9
  Top Layer w10: v1(2000,3040) 2000,2820 2025,2795 3770,2795 3795,2820 D17.28@3795,2955 ; D17.28@3787.4,2913.94 cw(c3769.05,2895.59) 3795,2895.59 cw(c3820.95,2895.59) D17.28@3802.6,2913.94 ; 2000,3018.27 ccw(c1978.27,3018.27) 1993.64,3033.64 cw(c1978.27,3018.27) 2000,3018.27 ; 2000,3018.27 cw(c2021.73,3018.27) 2006.36,3033.64 ccw(c2021.73,3018.27) 2000,3018.27
  Top Layer w20: P1.3@1515,3040 v1(1680,3040) R1.1@1735,3040 ; P1.3@1529.14,3025.86 cw(c1563.28,2991.72) 1563.28,3040 cw(c1563.28,3088.28) P1.3@1529.14,3054.14 ; R1.1@1727.93,3032.93 ccw(c1710.86,3015.86) 1710.86,3040 ccw(c1710.86,3064.14) R1.1@1727.93,3047.07
  Bottom Layer w10: v1(1680,3040) v1(2000,3040) ; v1@1686.36,3033.64 cw(c1701.73,3018.27) 1701.73,3040 cw(c1701.73,3061.73) v1@1686.36,3046.36 ; 1978.27,3040 ccw(c1978.27,3061.73) 1993.64,3046.36 cw(c1978.27,3061.73) 1978.27,3040 ; 1978.27,3040 cw(c1978.27,3018.27) 1993.64,3033.64 ccw(c1978.27,3018.27) 1978.27,3040
  other v1: 2000,3040
VCC: C1.1 C2.2 D17.4 D17.15 P1.5 R1.2 R2.2 R3.2 | length 3405.8
  Top Layer w20: P1.5@1529.14,2825.86 cw(c1599.5,2755.5) 1599.5,2855 ; 1551.21,2855 ccw(c1551.21,2803.79) P1.5@1515,2840 1530,2855 C1.1@1740,2855 C2.2@1845,2855 1905,2855 1930,2880 v1(1930,2955) 1930,3005 1895,3040 R1.2@1820,3040 R2.2@1820,3140 R3.2@1820,3240 ; C1.1@1724.93,2847.93 ccw(c1707.86,2830.86) 1707.86,2855 ccw(c1707.86,2879.14) C1.1@1724.93,2862.07 ; C1.1@1755.07,2847.93 cw(c1772.14,2830.86) 1772.14,2855 cw(c1772.14,2879.14) C1.1@1755.07,2862.07 ; R1.2@1812.93,3055.07 ccw(c1795.86,3072.14) 1820,3072.14 ccw(c1844.14,3072.14) R1.2@1827.07,3055.07 ; R2.2@1812.93,3124.93 cw(c1795.86,3107.86) 1820,3107.86 cw(c1844.14,3107.86) R2.2@1827.07,3124.93 ; R2.2@1812.93,3155.07 ccw(c1795.86,3172.14) 1820,3172.14 ccw(c1844.14,3172.14) R2.2@1827.07,3155.07 ; R3.2@1812.93,3224.93 cw(c1795.86,3207.86) 1820,3207.86 cw(c1844.14,3207.86) R3.2@1827.07,3224.93 ; R1.2@1827.07,3032.93 cw(c1844.14,3015.86) 1844.14,3040 cw(c1844.14,3064.14) R1.2@1827.07,3047.07 ; C2.2@1829.93,2847.93 ccw(c1812.86,2830.86) 1812.86,2855 ccw(c1812.86,2879.14) C2.2@1829.93,2862.07 ; C2.2@1860.07,2847.93 cw(c1877.14,2830.86) 1877.14,2855 cw(c1877.14,2879.14) C2.2@1860.07,2862.07 ; v1(2170,2955) D17.15@3145,2955 3145,3190 3175,3220 3620,3220 3645,3245 D17.4@3645,3295 ; 3623.5,3223.5 ccw(c3585.45,3261.54) D17.4@3639.25,3261.54
  Bottom Layer w20: v1(1930,2955) v1(2170,2955)
pads on no net: 1. 2. 3. 4. D17.1 D17.2

## Keep-outs
Keep-Out Layer:
  lines w10: 1400,2050 1400,4695 6124,4695 6124,2050 1400,2050

## Silkscreen, mask and mechanical layers (free items; w line width, h text height)
Top Overlay:
  text "IoT_HMI" at 2350,3185 h60
  text "20170924" at 2350,3080 h60

## Text inside footprints (layer, text, board x,y; h text height)
D18: Top Overlay "LED" at 2000,4170 h60
D19: Top Overlay "LED" at 3795,4055 h60